# EAGLE board Proiect v37 (EAGLE 9.7.0)
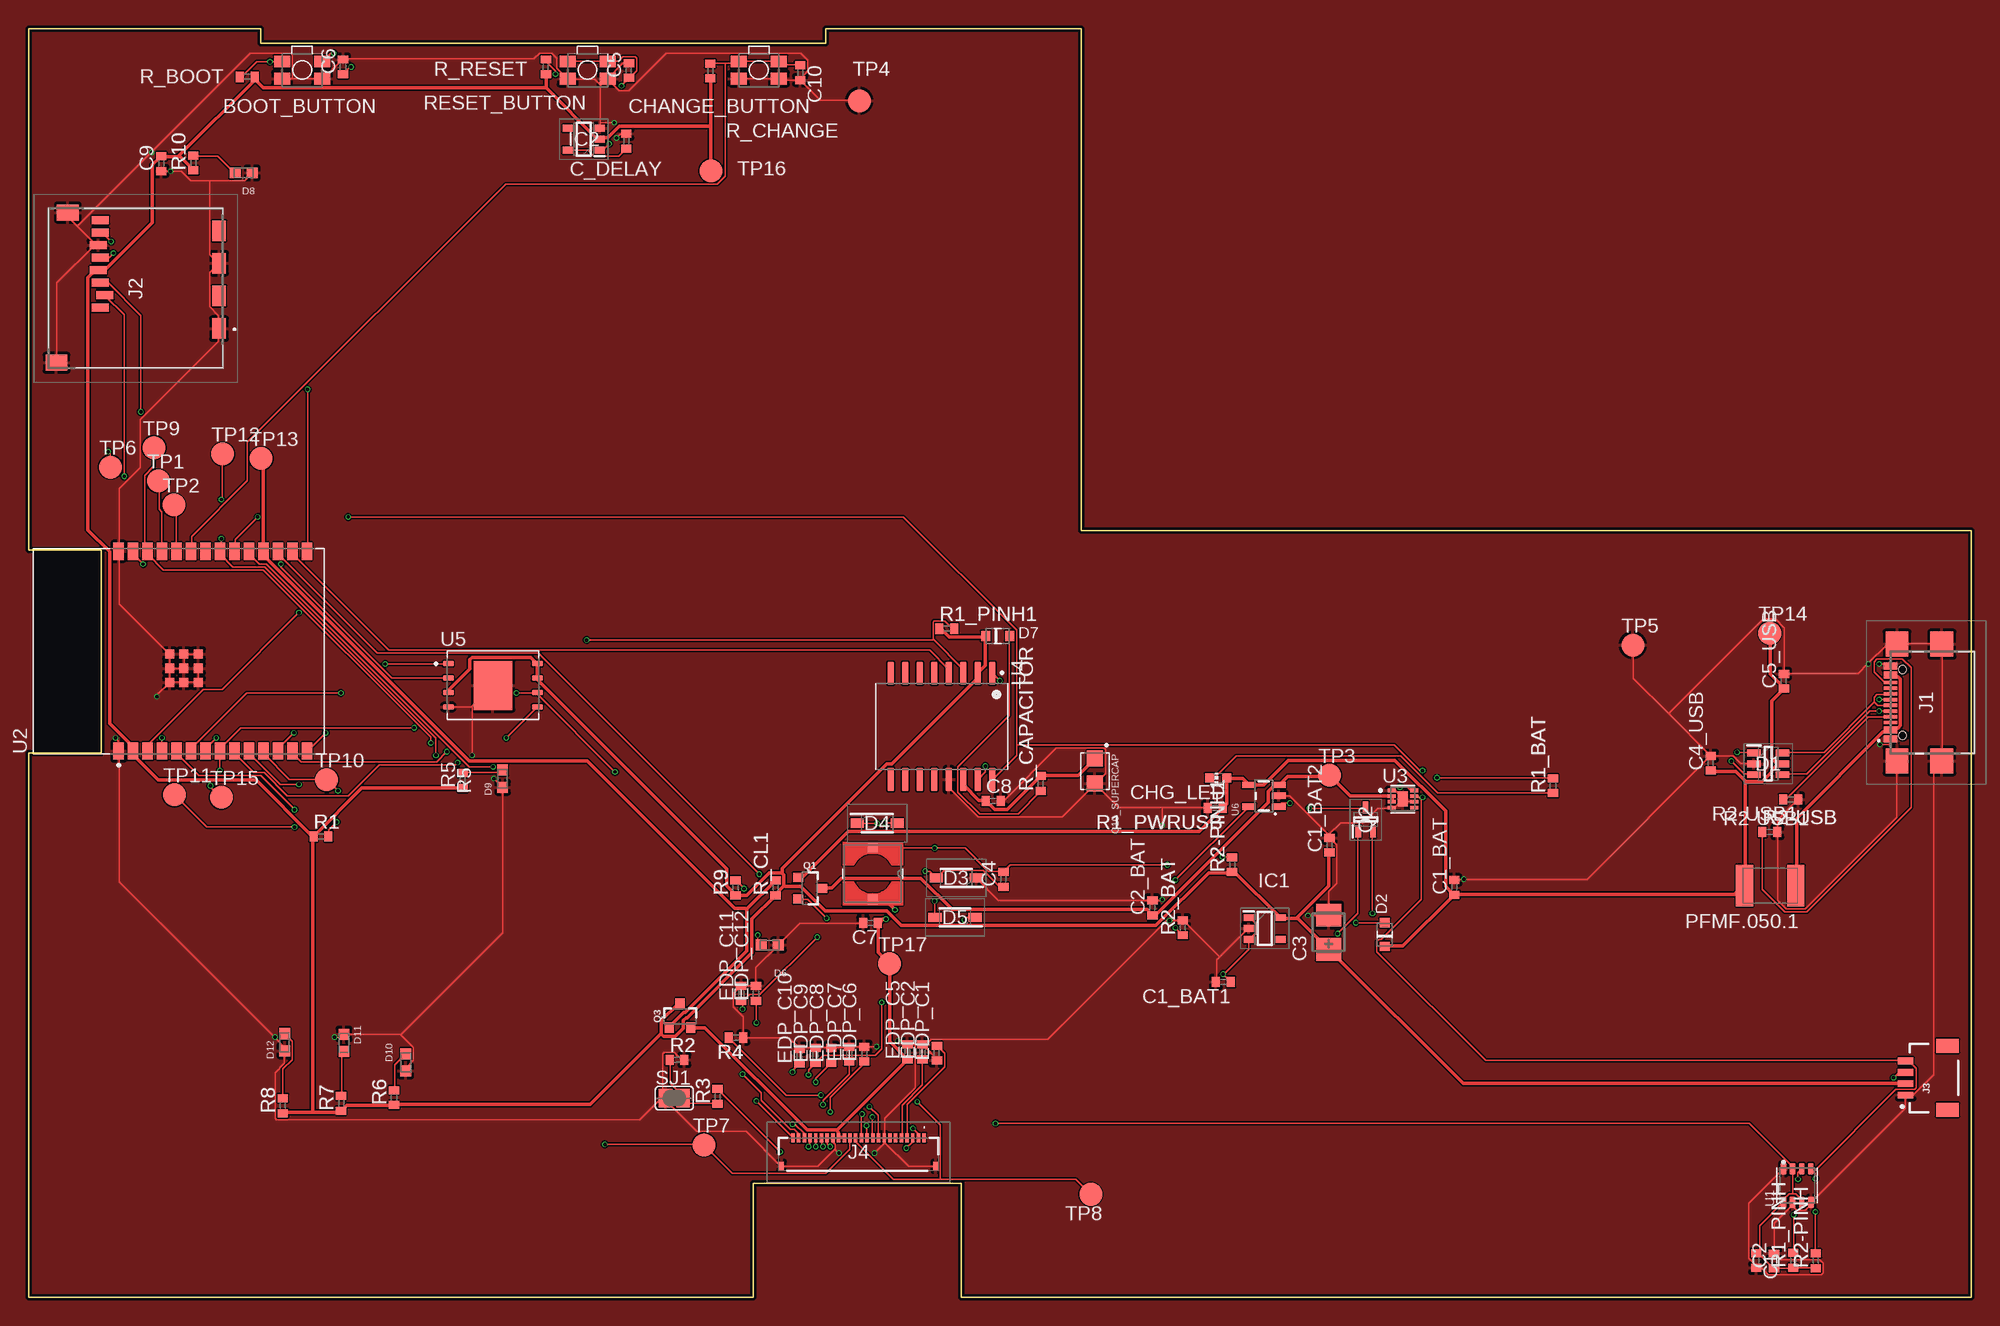
[diagram p0: board, top side]
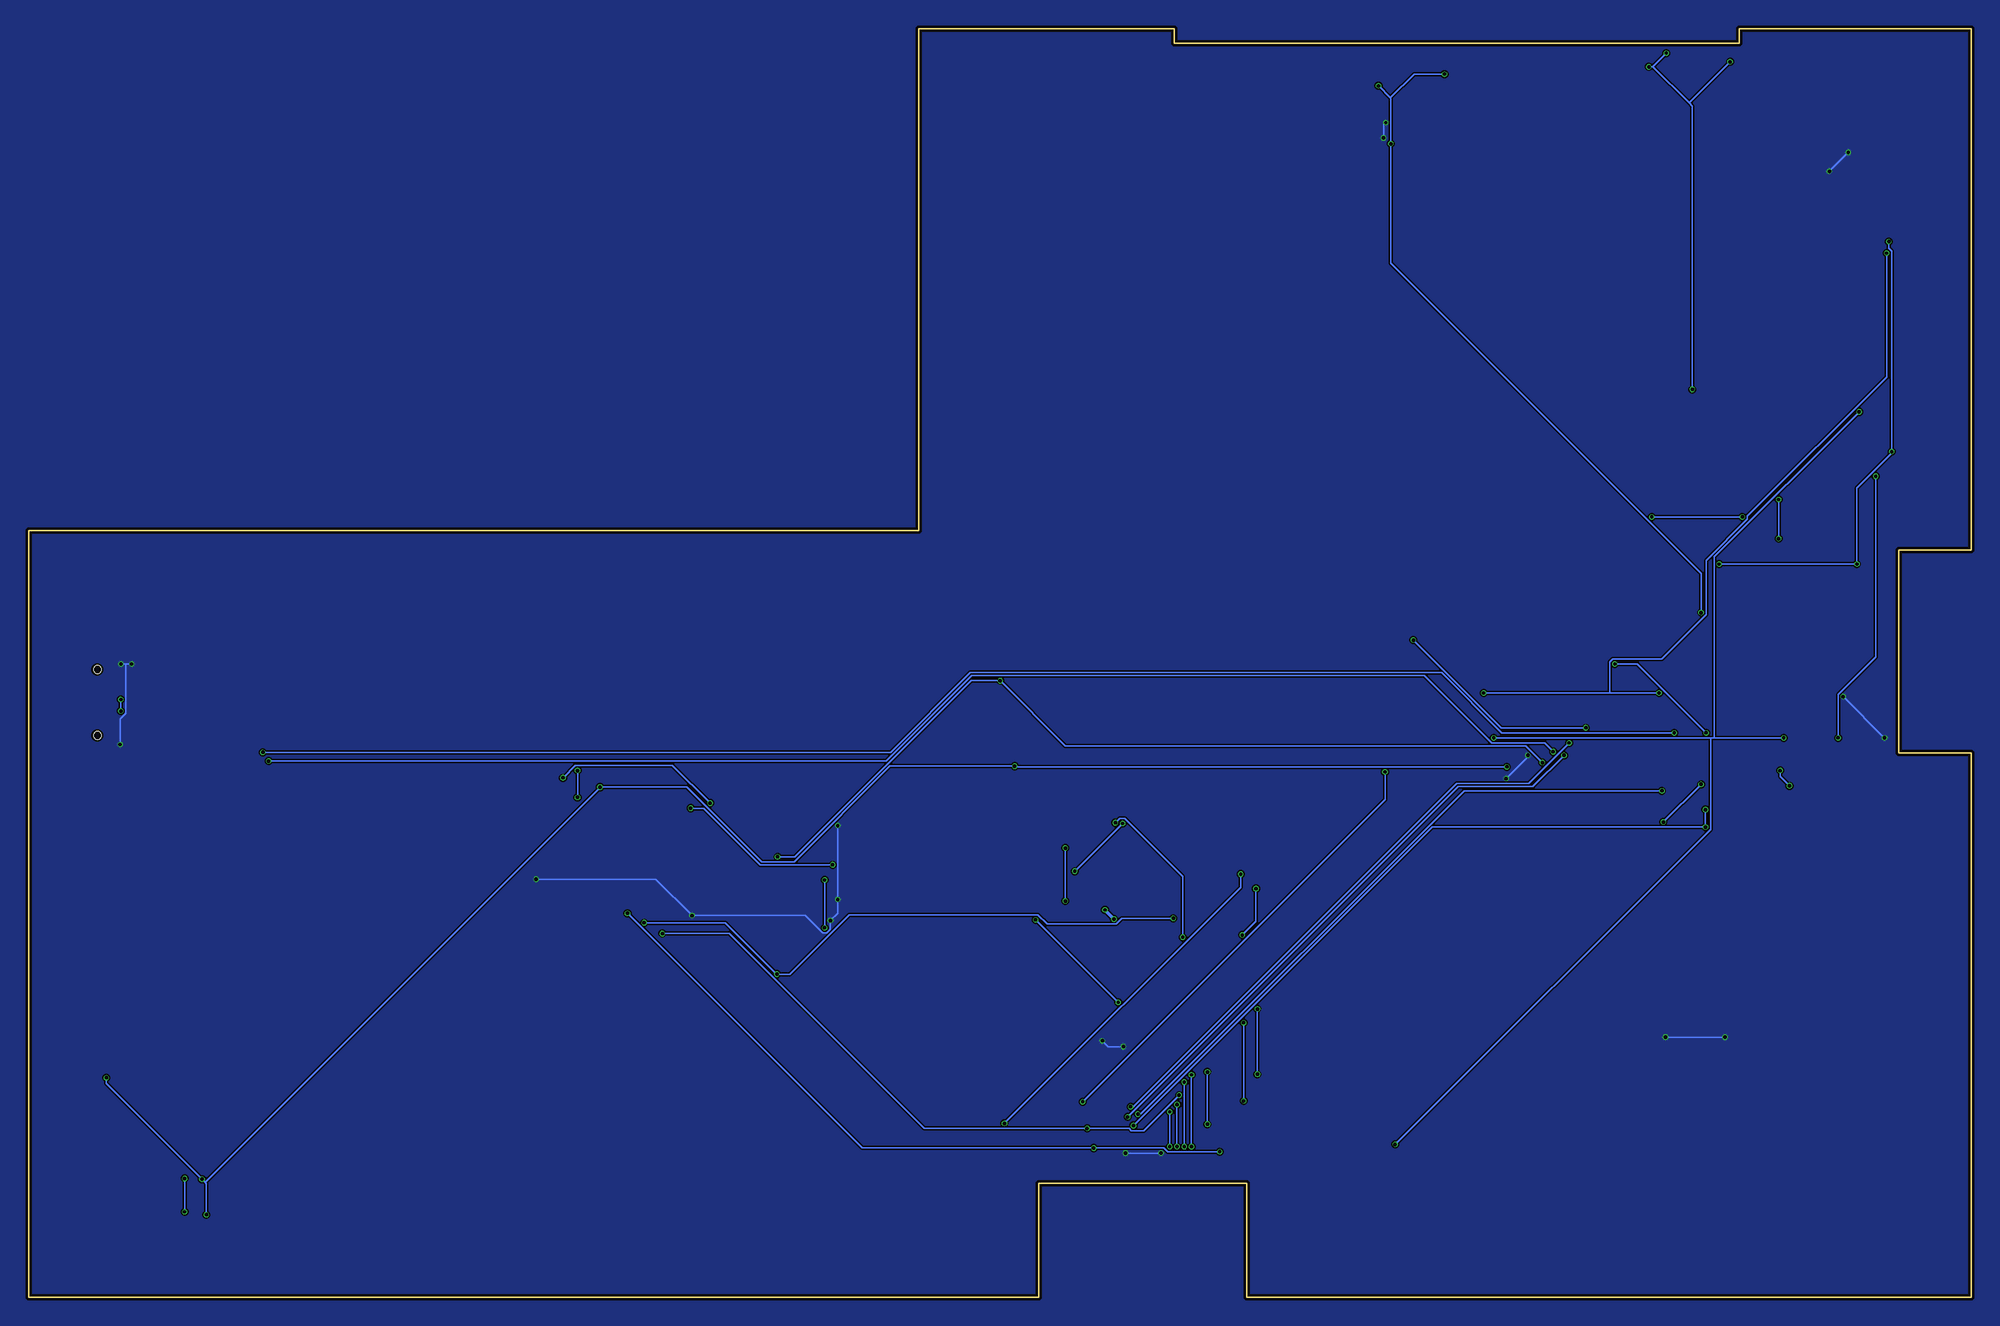
[diagram p1: board, bottom side, seen from below]

Size 170.2 x 111.2 mm. Coordinates in mm from the lower left corner, seen from the top.
Outline: 0,111.2 20.32,111.2 20.32,109.93 69.85,109.93 69.85,111.2 92.2,111.2 92.2,67.2 170.2,67.2 170.2,0 81.7,0 81.7,10 63.5,10 63.5,0 0,0 0,47.7 6.35,47.7 6.35,65.48 0,65.48 0,111.2
Copper layers (1*16): Top 0.035mm / dielectric 1.6mm / Bottom 0.035mm
Design rules "jlcpcb-2layers.dru": minimum track width 5mil, minimum drill 0.3mm, track to track 5mil, track to pad 5mil, pad to pad 5mil, via to via 5mil, smd to smd 5mil, copper to edge 0.2mm, drill to drill 6mil, minimum pad ring 10mil, minimum via ring 3mil, stop-mask expansion 4mil, vias tented up to drill 0mil, thermal gap 10mil
Net classes: 1 net: width 0.3 mm

## Footprints (pad centres in the part's own frame; a part is rotated, then mirrored left to right if it is on the bottom)
MYBUTTON = smd 1.4 x 1.05: 1 1.75,0.75; 2 -1.75,0.75; 3 -1.75,-0.75; 4 1.75,-0.75
ESP32_WROVER_EAGLE-LTSPICE_C0402 = smd 0.7 x 0.9: 1 -0.65,0; 2 0.65,0
RCL_CT3528 = smd 2 x 2.2: + -1.5,0; - 1.5,0
CAPCP3225X100N = smd 1.4 x 1.4: 1 -1.1,0; 2 1.1,0
ADAFRUIT_CHIP-LED0603 = smd 0.8 x 0.8: A 0,-0.75; C 0,0.75
SOT95P280X145-6N = smd 1.2 x 0.6: 1 -1.25,0.95; 2 -1.25,0; 3 -1.25,-0.95; 4 1.25,-0.95; 5 1.25,0; 6 1.25,0.95
ESP32_WROVER_AVX---SD0805S020S1R0_AVX_SD0805S020S1R0_0 = smd 0.8 x 0.9: 1 -1.05,0; 2 1.05,0
SOD3716X135N = smd 1.15 x 0.8: 1 -1.75,0; 2 1.75,0
DIOC1608X36N = smd 0.97 x 0.94: 1 -0.75,0; 2 0.75,0
SOT95P280X120-5N = smd 0.9 x 0.6: 1 -1.4,0.95; 2 -1.4,0; 3 -1.4,-0.95; 4 1.4,-0.95; 5 1.4,0.95
SOT95P280X125-5N = smd 0.9 x 0.6: 1 -1.4,0.95; 2 -1.4,0; 3 -1.4,-0.95; 4 1.4,-0.95; 5 1.4,0.95
SAMACSYS_PARTS_USB4110GFA = smd 0.3 x 1.15: A1 -3.35,3.678; A4 -2.55,3.678; A5 -1.25,3.678; A6 -0.25,3.678; A7 0.25,3.678; A8 1.25,3.678; A9 2.55,3.678; A12 3.35,3.678; B1 3.05,3.678; B4 2.25,3.678; B5 1.75,3.678; B6 0.75,3.678; B7 -0.75,3.678; B8 -1.75,3.678; B9 -2.25,3.678; B12 -3.05,3.678 | smd 2.18 x 2: MP1 -5.11,-0.827; MP2 5.11,-0.827; MP3 -5.11,3.103; MP4 5.11,3.103 | hole 0.65: -2.89,2.603; 2.89,2.603
112ATAARR03ATTEND = smd 1.8 x 1.2: G1 10.6,10.4; G2 4.9,10.4; S1 7.75,10.4; S2 2.05,10.4 | smd 1.4 x 1.9: G3 13.6,-3.85; G4 0.45,-2.85 | smd 0.7 x 1.5: P1 8.8,0; P2 7.7,0.4; P3 6.6,0; P4 5.5,-0.2; P5 4.4,0; P6 3.3,-0.2; P7 2.2,0; P8 1.1,0
JST04_1MM_RA = smd 0.6 x 1.35: 1 -1.5,0; 2 -0.5,0; 3 0.5,0; 4 1.5,0 | smd 1.2 x 2: NC1 2.8,-3.675; NC2 -2.8,-3.675
FH34SRJ24S05SH99 = smd 0.3 x 0.8: 1 5.75,1.45; 2 5.25,1.45; 3 4.75,1.45; 4 4.25,1.45; 5 3.75,1.45; 6 3.25,1.45; 7 2.75,1.45; 8 2.25,1.45; 9 1.75,1.45; 10 1.25,1.45; 11 0.75,1.45; 12 0.25,1.45; 13 -0.25,1.45; 14 -0.75,1.45; 15 -1.25,1.45; 16 -1.75,1.45; 17 -2.25,1.45; 18 -2.75,1.45; 19 -3.25,1.45; 20 -3.75,1.45; 21 -4.25,1.45; 22 -4.75,1.45; 23 -5.25,1.45; 24 -5.75,1.45 | smd 0.4 x 0.8: MP1 6.75,-1.05; MP2 -6.75,-1.05
IND_4828-WE-TPC_WRE = smd 0.889 x 0.889: 1 -2.286,0; 2 2.286,0
ESP32C6_VARISTOR_CT/CN1812 = smd 1.5 x 3.6: 1 -2.25,0; 2 2.25,0
ESP32_WROVER_SPARKFUN-DISCRETESEMI_SOT23-3 = smd 0.8 x 0.9: 1 -0.95,-1; 2 0.95,-1; 3 0,1.1
SOT65P210X110-3N = smd 1.05 x 0.5: 1 -1.05,0.65; 2 -1.05,-0.65; 3 1.05,0
ESP32_WROVER_EAGLE-LTSPICE_R0402 = smd 0.7 x 0.9: 1 -0.65,0; 2 0.65,0
SJ = smd 1.168 x 1.6: 1 -0.762,0; 2 0.762,0
TP20R = smd 2 x 2: TP 0,0
ESP32_WROVER_BME680_PSON80P300X300X100-8N = smd 1.016 x 0.5: 1 1.458,1.2; 2 1.458,0.4; 3 1.458,-0.4; 4 1.458,-1.2; 5 -1.458,-1.22; 6 -1.458,-0.4; 7 -1.458,0.4; 8 -1.458,1.2
XCVR_ESP32-C6-WROOM-1-N8 = smd 1.5 x 0.9: 1 -8.75,5.26; 2 -8.75,3.99; 3 -8.75,2.72; 4 -8.75,1.45; 5 -8.75,0.18; 6 -8.75,-1.09; 7 -8.75,-2.36; 8 -8.75,-3.63; 9 -8.75,-4.9; 10 -8.75,-6.17; 11 -8.75,-7.44; 12 -8.75,-8.71; 13 -8.75,-9.98; 14 -8.75,-11.25; 15 8.75,-11.25; 16 8.75,-9.98; 17 8.75,-8.71; 18 8.75,-7.44; 19 8.75,-6.17; 20 8.75,-4.9; 21 8.75,-3.63; 22 8.75,-2.36; 23 8.75,-1.09; 24 8.75,0.18; 25 8.75,1.45; 26 8.75,2.72; 27 8.75,3.99; 28 8.75,5.26 | smd 0.8 x 0.8: 29_1 -2.755,0.79; 29_2 -1.505,0.79; 29_3 -0.255,0.79; 29_4 -2.755,-0.46; 29_5 -1.505,-0.46; 29_6 -0.255,-0.46; 29_7 -2.755,-1.71; 29_8 -1.505,-1.71; 29_9 -0.255,-1.71
SON50P200X200X80-9N = smd 0.76 x 0.3: 1 -0.985,0.75; 2 -0.985,0.25; 3 -0.985,-0.25; 4 -0.985,-0.75; 5 0.985,-0.75; 6 0.985,-0.25; 7 0.985,0.25; 8 0.985,0.75 | smd 0.9 x 1.3: 9 0,0
SOIC127P1032X265-16N = smd 2.05 x 0.59: 1 -4.655,4.445; 2 -4.655,3.175; 3 -4.655,1.905; 4 -4.655,0.635; 5 -4.655,-0.635; 6 -4.655,-1.905; 7 -4.655,-3.175; 8 -4.655,-4.445; 9 4.655,-4.445; 10 4.655,-3.175; 11 4.655,-1.905; 12 4.655,-0.635; 13 4.655,0.635; 14 4.655,1.905; 15 4.655,3.175; 16 4.655,4.445
SON127P600X800X80-9N = smd 0.94 x 0.44: 1 -3.895,1.905; 2 -3.895,0.635; 3 -3.895,-0.635; 4 -3.895,-1.905; 5 3.895,-1.905; 6 3.895,-0.635; 7 3.895,0.635; 8 3.895,1.905 | smd 3.4 x 4.3: 9 0,0
ESP32_WROVER_SPARKFUN-IC-POWER_SOT23-5 = smd 0.55 x 1.2: 1 -0.95,-1.3; 2 0,-1.3; 3 0.95,-1.3; 4 0.95,1.3; 5 -0.95,1.3

## Placement (x,y rotation side)
BOOT_BUTTON  BUTTON_CUSYOMV11  [MYBUTTON]  23.97,107.56 180 top
C1  4.7uF  [ESP32_WROVER_EAGLE-LTSPICE_C0402]  151.34,3.23 270 top
C1_BAT  4.7uF  [ESP32_WROVER_EAGLE-LTSPICE_C0402]  124.9,35.94 90 top
C1_BAT1  4.7uF  [ESP32_WROVER_EAGLE-LTSPICE_C0402]  104.67,27.65 180 top
C1_BAT2  4.7uF  [ESP32_WROVER_EAGLE-LTSPICE_C0402]  113.97,39.64 90 top
C2  100nF  [ESP32_WROVER_EAGLE-LTSPICE_C0402]  152.9,3.2 90 top
C2_BAT  4.7uF  [ESP32_WROVER_EAGLE-LTSPICE_C0402]  98.45,34.15 90 top
C3  100uF TANT  [RCL_CT3528]  113.89,32 90 top
C4  4.7uF/25V  [ESP32_WROVER_EAGLE-LTSPICE_C0402]  85.4,36.64 90 top
C4_USB  100nF  [ESP32_WROVER_EAGLE-LTSPICE_C0402]  147.36,46.82 90 top
C5  1uF  [ESP32_WROVER_EAGLE-LTSPICE_C0402]  52.59,107.52 90 top
C5_USB  4.7uF  [ESP32_WROVER_EAGLE-LTSPICE_C0402]  153.77,54 90 top
C6  100nF  [ESP32_WROVER_EAGLE-LTSPICE_C0402]  27.55,107.84 90 top
C7  10uF  [ESP32_WROVER_EAGLE-LTSPICE_C0402]  73.76,32.83 180 top
C8  100nF  [ESP32_WROVER_EAGLE-LTSPICE_C0402]  84.5,43.52 0 top
C9  100nF  [ESP32_WROVER_EAGLE-LTSPICE_C0402]  11.62,99.36 90 top
C10  100nF  [ESP32_WROVER_EAGLE-LTSPICE_C0402]  67.61,107.33 270 top
C10_SUPERCAP  CPH3225A  [CAPCP3225X100N]  93.42,46.13 270 top
C_DELAY  100nF  [ESP32_WROVER_EAGLE-LTSPICE_C0402]  52.36,101.33 90 top
CHANGE_BUTTON  BUTTON_CUSYOMV11  [MYBUTTON]  63.97,107.56 180 top
CHG_LED  [ADAFRUIT_CHIP-LED0603]  104.22,45.53 90 top
D1  USBLC6-2SC6Y  [SOT95P280X145-6N]  152.4,46.76 0 top
D2  ESP32_WROVER_AVX---SD0805S020S1R0_AVX_SD0805S020S1R0_0_0  [ESP32_WROVER_AVX---SD0805S020S1R0_AVX_SD0805S020S1R0_0]  118.8,31.8 90 top
D3  MBR0530  [SOD3716X135N]  81.26,36.76 180 top
D4  MBR0530  [SOD3716X135N]  74.34,41.56 0 top
D5  MBR0530  [SOD3716X135N]  81.16,33.3 180 top
D6  PGB1010603MR1  [DIOC1608X36N]  64.94,30.89 180 top
D7  ESP32_WROVER_AVX---SD0805S020S1R0_AVX_SD0805S020S1R0_0_0  [ESP32_WROVER_AVX---SD0805S020S1R0_AVX_SD0805S020S1R0_0]  84.9,57.96 0 top
D8  PGB1010603MR1  [DIOC1608X36N]  18.84,98.55 180 top
D9  PGB1010603MR1  [DIOC1608X36N]  41.53,45.46 90 top
D10  PGB1010603MR1  [DIOC1608X36N]  33.04,20.61 90 top
D11  PGB1010603MR1  [DIOC1608X36N]  27.63,22.32 270 top
D12  PGB1010603MR1  [DIOC1608X36N]  22.44,22.37 90 top
EDP_C1  1uF/50V  [ESP32_WROVER_EAGLE-LTSPICE_C0402]  79.57,21.41 90 top
EDP_C2  1uF/50V  [ESP32_WROVER_EAGLE-LTSPICE_C0402]  78.31,21.51 90 top
EDP_C5  0.1uF/50V  [ESP32_WROVER_EAGLE-LTSPICE_C0402]  76.99,21.52 90 top
EDP_C6  0.1uF/50V  [ESP32_WROVER_EAGLE-LTSPICE_C0402]  73.2,21.32 90 top
EDP_C7  0.1uF/50V  [ESP32_WROVER_EAGLE-LTSPICE_C0402]  71.89,21.33 90 top
EDP_C8  0.1uF/50V  [ESP32_WROVER_EAGLE-LTSPICE_C0402]  70.32,21.23 90 top
EDP_C9  0.1uF/50V  [ESP32_WROVER_EAGLE-LTSPICE_C0402]  68.93,21.23 90 top
EDP_C10  0.1uF/50V  [ESP32_WROVER_EAGLE-LTSPICE_C0402]  67.53,21.15 90 top
EDP_C11  0.1uF/50V  [ESP32_WROVER_EAGLE-LTSPICE_C0402]  62.42,26.64 90 top
EDP_C12  0.1uF/50V  [ESP32_WROVER_EAGLE-LTSPICE_C0402]  63.73,26.64 90 top
IC1  XC6220A331MR-G  [SOT95P280X120-5N]  108.29,32.33 0 top
IC2  BD5229G-TR  [SOT95P280X125-5N]  48.64,101.5 180 top
J1  SAMACSYS_PARTS_USB4110-GF-A  [SAMACSYS_PARTS_USB4110GFA]  166.78,52.14 90 top
J2  112A-TAAR-R03_ATTEND  [112ATAARR03ATTEND]  6.29,95.52 270 top
J3  QWIIC_RIGHT_ANGLE  [JST04_1MM_RA]  164.43,19.24 90 top
J4  FH34SRJ-24S-0.5SH_99_  [FH34SRJ24S05SH99]  72.71,12.54 0 top
L1  744043680IND_4828-WE-TPC_WRE  [IND_4828-WE-TPC_WRE]  73.96,37.14 270 top
PFMF.050.1  ESP32C6_VARISTORCN1812  [ESP32C6_VARISTOR_CT/CN1812]  152.57,36.09 180 top
Q1  20V/4.2A/52mΩ/1.4W  [ESP32_WROVER_SPARKFUN-DISCRETESEMI_SOT23-3]  68.43,35.86 270 top
Q2  SI1308EDL-T1-GE3  [SOT65P210X110-3N]  117.13,41.88 90 top
Q3  20V/4.2A/52mΩ/1.4W  [ESP32_WROVER_SPARKFUN-DISCRETESEMI_SOT23-3]  57.07,24.65 0 top
R1  10K  [ESP32_WROVER_EAGLE-LTSPICE_R0402]  25.62,40.4 0 top
R1_BAT  200  [ESP32_WROVER_EAGLE-LTSPICE_R0402]  133.54,44.84 90 top
R1_PINH  10K  [ESP32_WROVER_EAGLE-LTSPICE_R0402]  154.59,3.25 90 top
R1_PINH1  10K  [ESP32_WROVER_EAGLE-LTSPICE_R0402]  80.44,58.61 0 top
R1_PWRUSB  100K  [ESP32_WROVER_EAGLE-LTSPICE_R0402]  103.97,42.9 180 top
R2  2.2  [ESP32_WROVER_EAGLE-LTSPICE_R0402]  56.81,20.82 0 top
R2-PINH  10K  [ESP32_WROVER_EAGLE-LTSPICE_R0402]  156.55,3.22 90 top
R2-PINH1  10K  [ESP32_WROVER_EAGLE-LTSPICE_R0402]  105.43,37.92 90 top
R2-USB  5k1  [ESP32_WROVER_EAGLE-LTSPICE_R0402]  152.54,40.8 0 top
R2-USB1  5k1  [ESP32_WROVER_EAGLE-LTSPICE_R0402]  154.36,43.65 180 top
R2_BAT  2K  [ESP32_WROVER_EAGLE-LTSPICE_R0402]  101.11,32.4 90 top
R3  0.47  [ESP32_WROVER_EAGLE-LTSPICE_R0402]  60.36,17.62 90 top
R4  10K  [ESP32_WROVER_EAGLE-LTSPICE_R0402]  61.98,22.77 180 top
R5  10K  [ESP32_WROVER_EAGLE-LTSPICE_R0402]  38.04,45.32 90 top
R6  10K  [ESP32_WROVER_EAGLE-LTSPICE_R0402]  32.01,17.52 90 top
R7  10K  [ESP32_WROVER_EAGLE-LTSPICE_R0402]  27.38,17.02 90 top
R8  10K  [ESP32_WROVER_EAGLE-LTSPICE_R0402]  22.26,16.8 90 top
R9  10K  [ESP32_WROVER_EAGLE-LTSPICE_R0402]  61.93,35.9 90 top
R10  10K  [ESP32_WROVER_EAGLE-LTSPICE_R0402]  14.43,99.42 90 top
R_BOOT  10K  [ESP32_WROVER_EAGLE-LTSPICE_R0402]  19.16,106.96 180 top
R_CAPACITOR  15K  [ESP32_WROVER_EAGLE-LTSPICE_R0402]  88.67,45.03 90 top
R_CHANGE  10K  [ESP32_WROVER_EAGLE-LTSPICE_R0402]  59.71,107.48 90 top
R_CL1  10K  [ESP32_WROVER_EAGLE-LTSPICE_R0402]  65.44,35.9 90 top
R_RESET  10K  [ESP32_WROVER_EAGLE-LTSPICE_R0402]  45.32,107.84 90 top
RESET_BUTTON  BUTTON_CUSYOMV11  [MYBUTTON]  48.97,107.56 180 top
SJ1  [SJ]  56.57,17.47 0 top
TP1  TP  [TP20R]  11.38,71.55 0 top
TP2  TP  [TP20R]  12.73,69.45 0 top
TP3  TP  [TP20R]  113.98,45.75 0 top
TP4  TP  [TP20R]  72.78,104.86 0 top
TP5  TP  [TP20R]  140.53,57.16 0 top
TP6  TP  [TP20R]  7.18,72.76 0 top
TP7  TP  [TP20R]  59.17,13.36 0 top
TP8  TP  [TP20R]  93.07,9.04 180 top
TP9  TP  [TP20R]  10.99,74.46 0 top
TP10  TP  [TP20R]  26.11,45.36 0 top
TP11  TP  [TP20R]  12.78,44.04 0 top
TP12  TP  [TP20R]  17.01,73.92 0 top
TP13  TP  [TP20R]  20.37,73.52 0 top
TP14  TP  [TP20R]  152.53,58.22 0 top
TP15  TP  [TP20R]  16.89,43.82 0 top
TP16  TP  [TP20R]  59.78,98.74 0 top
TP17  TP  [TP20R]  75.43,29.24 0 top
U1  ESP32_WROVER_BME680_BME680  [ESP32_WROVER_BME680_PSON80P300X300X100-8N]  154.93,9.81 90 top
U2  ESP32-C6-WROOM-1-N8  [XCVR_ESP32-C6-WROOM-1-N8]  13.15,56.64 90 top
U3  MAX17048G+T10  [SON50P200X200X80-9N]  120.39,43.68 0 top
U4  DS3231SN#  [SOIC127P1032X265-16N]  79.99,50.04 270 top
U5  W25Q512JVEIQ  [SON127P600X800X80-9N]  40.68,53.64 0 top
U6  ESP32_WROVER_SPARKFUN-IC-POWER_MCP73831  [ESP32_WROVER_SPARKFUN-IC-POWER_SOT23-5]  108.21,43.96 90 top

## Library data of the parts
BOOT_BUTTON C1 C1_BAT1 C1_BAT2 C2 C4_USB C5 C5_USB C6 C8-C10 C_DELAY CHANGE_BUTTON CHG_LED D2 D6-D12 EDP_C1 EDP_C2 EDP_C5-EDP_C12 PFMF.050.1 R1 R1_BAT R1_PINH R1_PINH1 R1_PWRUSB R2 R2-PINH R2-PINH1 R2-USB R2-USB1 R2_BAT R3-R10 R_BOOT R_CAPACITOR R_CHANGE R_CL1 R_RESET RESET_BUTTON SJ1 TP1-TP17 = DeskAssistant v19 v1
C1_BAT C2_BAT C4 C7 = DeskAssistant v19 v1; SPICEMODEL: NONE; SPICEPREFIX: C
C3 = DeskAssistant v19 v1; SPICEPREFIX: C
C10_SUPERCAP = DeskAssistant v19 v1; AVAILABILITY: Not in stock; CHECK_PRICES: https://www.snapeda.com/parts/CPH3225A/Seiko+Instruments/view-part/?ref=eda; DESCRIPTION: 11 mF (EDLC) Supercapacitor 3.3 V 1210 (3225 Metric) - -; MF: Seiko Instruments; MP: CPH3225A; PACKAGE: 1210 Seiko; PRICE: None; PURCHASE-URL: https://www.snapeda.com/api/url_track_click_mouser/?unipart_id=562593&manufacturer=Seiko Instruments&part_name=CPH3225A&search_term=None; SNAPEDA_LINK: https://www.snapeda.com/parts/CPH3225A/Seiko+Instruments/view-part/?ref=snap
D1 = DeskAssistant v19 v1; AVAILABILITY: In Stock; CHECK_PRICES: https://www.snapeda.com/parts/USBLC6-2SC6Y/STMicroelectronics/view-part/?ref=eda; DESCRIPTION: 17V Clamp 5A (8/20µs) Ipp Tvs Diode Surface Mount SOT-23-6; MF: STMicroelectronics; MP: USBLC6-2SC6Y; PACKAGE: SOT-23-6 STMicroelectronics; PRICE: None; SNAPEDA_LINK: https://www.snapeda.com/parts/USBLC6-2SC6Y/STMicroelectronics/view-part/?ref=snap
D3-D5 = DeskAssistant v19 v1; AVAILABILITY: In Stock; CHECK_PRICES: https://www.snapeda.com/parts/MBR0530/Onsemi/view-part/?ref=eda; DESCRIPTION: Diode Schottky 30 V 500mA Surface Mount SOD-123; MF: ON Semiconductor; MP: MBR0530; PACKAGE: SOD-123-2 ON Semiconductor; PRICE: None; PURCHASE-URL: https://www.snapeda.com/api/url_track_click_mouser/?unipart_id=179458&manufacturer=ON Semiconductor&part_name=MBR0530&search_term=None; SNAPEDA_LINK: https://www.snapeda.com/parts/MBR0530/Onsemi/view-part/?ref=snap
IC1 = DeskAssistant v19 v1; DESCRIPTION: LDO Voltage Regulators; HEIGHT: 1.2mm; MANUFACTURER_NAME: Torex; MANUFACTURER_PART_NUMBER: XC6220A331MR-G; MOUSER_PART_NUMBER: 865-XC6220A331MR-G; MOUSER_PRICE-STOCK: https://www.mouser.co.uk/ProductDetail/Torex-Semiconductor/XC6220A331MR-G?qs=AsjdqWjXhJ8ZSWznL1J0gg%3D%3D
IC2 = DeskAssistant v19 v1; DESCRIPTION: Voltage Detector with Adjustable Delay Time: CMOS processes are utilized to develop high precision, low current consumption CMOS reset ICs that allow arbitrary setting of the delay time. The extensive lineup includes both Nch Open Drain and CMOS output types in a wide range of detection voltages (from 2.3V to 6.0V, in 0.1V steps), enabling selection of the ideal solution based on customer requirements. In addition, the entire series is of course both lead-free and RoHS-compliant.; HEIGHT: 1.25mm; MANUFACTURER_NAME: ROHM Semiconductor; MANUFACTURER_PART_NUMBER: BD5229G-TR; MOUSER_PART_NUMBER: 755-BD5229G-TR; MOUSER_PRICE-STOCK: https://www.mouser.co.uk/ProductDetail/ROHM-Semiconductor/BD5229G-TR?qs=4kLU8WoGk0vvnhrrYwdszw%3D%3D
J1 = DeskAssistant v19 v1; DESCRIPTION: CONN USB 2.0 TYPE-C R/A SMT; HEIGHT: 3.26mm; MANUFACTURER_NAME: GCT (GLOBAL CONNECTOR TECHNOLOGY); MANUFACTURER_PART_NUMBER: USB4110-GF-A; MOUSER_PART_NUMBER: 640-USB4110-GF-A; MOUSER_PRICE-STOCK: https://www.mouser.co.uk/ProductDetail/GCT/USB4110-GF-A?qs=KUoIvG%2F9IlYiZvIXQjyJeA%3D%3D
J2 = DeskAssistant v19 v1; DESCRIPTION: Micro SD Card Socket, Push-Push Type, Top Mount, SMT, H=1.83mm, 10u; HEIGHT: 1.9mm; MANUFACTURER_NAME: ATTEND; MANUFACTURER_PART_NUMBER: 112A-TAAR-R03 ATTEND
J3 = DeskAssistant v19 v1; PROD_ID: CONN-13694
J4 = DeskAssistant v19 v1; DESCRIPTION: 24 Position FFC, FPC Connector Contacts, Top and Bottom 0.020" (0.50mm) Surface Mount, Right Angle; HEIGHT: 1.1mm; MANUFACTURER_NAME: Hirose; MANUFACTURER_PART_NUMBER: FH34SRJ-24S-0.5SH(99); MOUSER_PART_NUMBER: 798-FH34SRJ24S05SH99; MOUSER_PRICE-STOCK: https://www.mouser.co.uk/ProductDetail/Hirose-Connector/FH34SRJ-24S-0.5SH99?qs=vcbW%252B4%252BSTIpKBl5ap9J8Fw%3D%3D
L1 = DeskAssistant v19 v1; COPYRIGHT: Copyright (C) 2024 Ultra Librarian. All rights reserved.; MANUFACTURER_PART_NUMBER: 744043680; MFR_NAME: Wurth Electronics
Q1 Q3 = DeskAssistant v19 v1; PROD_ID: TRAN-14388
Q2 = DeskAssistant v19 v1; AVAILABILITY: In Stock; CHECK_PRICES: https://www.snapeda.com/parts/SI1308EDL-T1-GE3/Vishay+Siliconix/view-part/?ref=eda; DESCRIPTION: Si1308EDL-T1-GE3 N-channel MOSFET Transistor, 1.5 A, 30 V, 3-Pin SC-70 | Siliconix / Vishay SI1308EDL-T1-GE3; MF: Vishay Siliconix; MP: SI1308EDL-T1-GE3; PACKAGE: SOT-323 Vishay Semiconductor; PRICE: None; PURCHASE-URL: https://www.snapeda.com/api/url_track_click_mouser/?unipart_id=274603&manufacturer=Vishay Siliconix&part_name=SI1308EDL-T1-GE3&search_term=None; SNAPEDA_LINK: https://www.snapeda.com/parts/SI1308EDL-T1-GE3/Vishay+Siliconix/view-part/?ref=snap
U1 = DeskAssistant v19 v1; AVAILABILITY: Unavailable; DESCRIPTION: Integrated Environmental Unit; MF: Bosch Sensortec; MP: BME680; PACKAGE: LGA-8 Bosch Tools; PRICE: None
U2 = DeskAssistant v19 v1; AVAILABILITY: In Stock; CHECK_PRICES: https://www.snapeda.com/parts/ESP32-C6-WROOM-1-N8/Espressif+Systems/view-part/?ref=eda; DESCRIPTION: Multiprotocol Modules ESP32-C6 module, Wi-Fi 6 in 2.4 GHz band, Bluetooth 5, Zigbee 3.0 and Thread. ESP34-WROOM Compatible - ENGINEERING SAMPLE; MF: Espressif Systems; MP: ESP32-C6-WROOM-1-N8; PACKAGE: None; PRICE: None; SNAPEDA_LINK: https://www.snapeda.com/parts/ESP32-C6-WROOM-1-N8/Espressif+Systems/view-part/?ref=snap
U3 = DeskAssistant v19 v1; AVAILABILITY: In Stock; CHECK_PRICES: https://www.snapeda.com/parts/MAX17048G+T10/Analog+Devices/view-part/?ref=eda; DESCRIPTION: 3µA 1-Cell/2-Cell Fuel Gauge with ModelGauge; MF: Analog Devices; MP: MAX17048G+T10; PACKAGE: TDFN-8 Maxim; PRICE: None; PURCHASE-URL: https://www.snapeda.com/api/url_track_click_mouser/?unipart_id=329239&manufacturer=Analog Devices&part_name=MAX17048G+T10&search_term=None; SNAPEDA_LINK: https://www.snapeda.com/parts/MAX17048G+T10/Analog+Devices/view-part/?ref=snap
U4 = DeskAssistant v19 v1; AVAILABILITY: In Stock; CHECK_PRICES: https://www.snapeda.com/parts/DS3231SN%23/Analog+Devices/view-part/?ref=eda; DESCRIPTION: Extremely Accurate I²C-Integrated RTC/TCXO/Crystal; MF: Analog Devices; MP: DS3231SN#; PACKAGE: SOIC-16 Maxim; PRICE: None; PURCHASE-URL: https://www.snapeda.com/api/url_track_click_mouser/?unipart_id=99048&manufacturer=Analog Devices&part_name=DS3231SN#&search_term=None; SNAPEDA_LINK: https://www.snapeda.com/parts/DS3231SN%23/Analog+Devices/view-part/?ref=snap
U5 = DeskAssistant v19 v1; AVAILABILITY: In Stock; CHECK_PRICES: https://www.snapeda.com/parts/W25Q512JVEIQ/Winbond+Electronics/view-part/?ref=eda; DESCRIPTION: FLASH - NOR Memory IC 512Mb (64M x 8) SPI - Quad I/O 133 MHz 8-WSON (8x6); MF: Winbond Electronics; MP: W25Q512JVEIQ; PACKAGE: Package; PRICE: None; SNAPEDA_LINK: https://www.snapeda.com/parts/W25Q512JVEIQ/Winbond+Electronics/view-part/?ref=snap
U6 = DeskAssistant v19 v1; PROD_ID: IC-09995

## Nets
3V3 [net]: C1_BAT2.1 C3.+ C9.2 D7.1 IC1.5 IC2.2 J2.P4 J3.2 Q3.3 R1.1 R1_PINH1.1 R2-PINH1.1 R5.1 R6.1 R7.1 R8.1 R9.1 R10.1 R_BOOT.1 R_CHANGE.1 R_CL1.1 R_RESET.1 TP16.TP U2.2 U4.2 U5.3 U5.7 U5.8
32KHZ: R2-PINH1.2 U2.9 U4.1
DN: D1.4 J1.A7 J1.B7
DP: D1.6 J1.A6 J1.B6
EPD_3V3 [net]: C7.1 EDP_C5.1 J4.15 J4.16 L1.2 Q3.2 TP17.TP
EPD_3V3_C [net]: Q3.1 R_CL1.2 TP13.TP U2.18
EPD_BUSY: J4.9 TP9.TP U2.26
EPD_CS: J4.12 TP10.TP U2.11
EPD_DC: J4.11 TP11.TP U2.5
EPD_RST: J4.10 TP12.TP U2.21
FLASH_CS: U2.12 U5.1
GDR: J4.2 Q2.1 R4.2
GND: BOOT_BUTTON.1 BOOT_BUTTON.2 C1.2 C1_BAT1.2 C1_BAT2.2 C1_BAT.2 C2.2 C2_BAT.2 C3.- C4_USB.2 C5.2 C5_USB.2 C6.2 C7.2 C8.2 C9.1 C10.2 C10_SUPERCAP.2 C_DELAY.2 CHANGE_BUTTON.1 CHANGE_BUTTON.2 D1.2 D3.1 D6.1 D8.1 D9.1 D10.1 D11.1 D12.1 EDP_C1.1 EDP_C2.2 EDP_C5.2 EDP_C6.2 EDP_C7.2 EDP_C8.2 EDP_C9.2 EDP_C10.2 EDP_C11.2 EDP_C12.2 IC1.2 IC2.3 J1.A1 J1.A12 J1.B1 J1.B12 J1.MP1 J1.MP2 J1.MP3 J1.MP4 J2.G1 J2.G2 J2.G3 J2.G4 J2.P6 J3.1 J4.8 J4.17 J4.MP1 J4.MP2 R1_PWRUSB.2 R2-USB1.1 R2-USB.2 R2.2 R2_BAT.2 R4.1 RESET_BUTTON.1 RESET_BUTTON.2 SJ1.1 TP4.TP TP5.TP U1.1 U1.5 U1.7 U2.1 U2.28 U2.29_1 U2.29_2 U2.29_3 U2.29_4 U2.29_5 U2.29_6 U2.29_7 U2.29_8 U2.29_9 U3.1 U3.4 U3.6 U3.9 U4.13 U5.4 U5.9 U6.2
GPI08: R1.2 U2.10
I2C_PW: C1.1 C2.1 R1_PINH.1 R2-PINH.1 U1.2 U1.6 U1.8 U2.17
INT_RTC: R1_PINH1.2 TP15.TP U2.8 U4.3
IO/BOOT: BOOT_BUTTON.3 BOOT_BUTTON.4 C6.1 R_BOOT.2 U2.15
IO/CHANGE: C10.1 CHANGE_BUTTON.3 CHANGE_BUTTON.4 R_CHANGE.2 U2.23
MISO: J2.P7 TP6.TP U2.27 U5.2
MOSI: J2.P3 J4.14 TP7.TP U2.7 U5.5
N$1: EDP_C6.1 J4.18
N$2: C1_BAT1.1 D2.2 IC1.1 IC1.3 Q1.2
N$3: J1.A5 R2-USB1.2
N$4: EDP_C7.1 J4.19
N$5: EDP_C1.2 J4.4
N$6: EDP_C2.1 J4.5
N$7: EDP_C8.1 J4.20
N$8: C_DELAY.1 IC2.5
N$9: EDP_C12.1 J4.24
N$10: D7.2 R_CAPACITOR.1
N$11: J1.B5 R2-USB.1
N$12: EDP_C10.1 J4.22
N$13: D12.2 R8.2
N$14: D11.2 R7.2
N$15: D10.2 R6.2
N$16: D9.2 R5.2
N$17: D6.2 R9.2
N$18: D8.2 R10.2
N$19: R1_BAT.2 U6.1
N$20: CHG_LED.C R1_BAT.1
N$21: R2_BAT.1 U6.5
N$23: C4.1 D3.2 D4.1
PREVGH: D5.1 EDP_C9.1 J4.21
PREVGL: D4.2 EDP_C11.1 J4.23
RESE: J4.3 Q2.2 R3.2
RESE': R2.1 R3.1 SJ1.2
RESET: C5.1 IC2.1 R_RESET.2 RESET_BUTTON.3 RESET_BUTTON.4 U2.3
RTC_RST: U2.16 U4.4
RX: TP2.TP U2.24
SCK: J2.P5 J4.13 TP8.TP U2.6 U5.6
SCL: J3.4 R2-PINH.2 U1.4 U2.20 U3.7 U4.16
SDA: J3.3 R1_PINH.2 U1.3 U2.19 U3.8 U4.15
SRC: C4.2 D5.2 L1.1 Q2.3
SS_SD: J2.P2 U2.4
TX: TP1.TP U2.25
USB_D+: D1.1 U2.14
USB_D-: D1.3 U2.13
VBAT [net]: C2_BAT.1 Q1.3 TP3.TP U3.2 U3.3 U6.3
VBUS [net]: C1_BAT.1 C4_USB.1 C5_USB.1 CHG_LED.A D1.5 D2.1 PFMF.050.1.2 Q1.1 R1_PWRUSB.1 TP14.TP U6.4
VRTC [net]: C8.1 C10_SUPERCAP.1 R_CAPACITOR.2 U4.14
VUSB [net]: J1.A4 J1.A9 J1.B4 J1.B9 PFMF.050.1.1

## Tracks (layer width: path | path; a pad name or v marks a point on that pad's centre or on a via)
3V3
  Top 0.3: 111.19,33.22 109.73,33.22 IC1.5 109.6,33.35 105.73,37.22 105.47,37.22 R2-PINH1.1 105.28,37.22 103.38,37.22 98.74,32.59 76.45,32.59 75.18,33.86 69.79,33.86 67.63,36.02 66.29,36.02 66.17,36.08 | 111.19,33.22 113.86,30.56 C3.+ 113.98,30.43 125.67,18.74 164.4,18.74 J3.2 | C1_BAT2.1 113.92,38.94 113.92,36.08 111.19,33.35 111.19,33.22 | 45.34,105.99 49.78,101.55 50.04,101.55 IC2.2 50.16,101.61 50.74,101.61 51.75,102.63 59.75,102.63 | 45.34,105.99 45.34,107.14 R_RESET.1 | 59.75,102.63 59.75,98.75 TP16.TP | 59.75,102.63 59.75,106.82 R_CHANGE.1 | 13.21,99.96 13.27,99.96 14.41,98.82 R10.1 | 13.21,99.96 11.62,99.96 C9.2 11.49,99.9 10.86,99.26 10.86,94.18 6.73,90.06 6.1,90.06 J2.P4 5.97,89.99 5.84,89.99 5.21,89.36 5.21,67.26 7.11,65.35 7.11,50.3 9.14,48.27 9.14,48.02 U2.2 9.21,47.83 9.21,47.51 11.37,45.35 19.94,45.35 24.83,40.46 R1.1 | 13.21,99.96 13.21,100.09 19.81,106.69 19.81,106.95 R_BOOT.1 19.94,106.63 20.57,105.99 45.34,105.99 | 24.89,16.2 27.24,16.2 27.37,16.33 R7.1 27.5,16.46 27.88,16.84 32,16.84 R6.1 32.13,16.9 49.21,16.9 55.31,23 55.44,23.06 | 24.89,16.2 22.29,16.2 R8.1 | R1.1 25.02,40.46 29.21,44.65 38.04,44.65 R5.1 | 24.89,16.2 24.89,40.27 R1.1 | U5.3 36.83,53.03 36.83,53.23 38.67,55.07 38.67,55.89 38.86,56.08 44.01,56.08 44.51,55.57 U5.8 44.58,55.45 44.58,54.3 U5.7 44.64,54.18 44.64,54.05 61.15,37.54 61.15,36.08 61.85,35.38 R9.1 61.98,35.25 62.93,35.25 64.9,37.22 65.98,37.22 | R1_PINH1.1 79.82,58.56 79.95,58.56 80.64,57.86 83.69,57.86 D7.1 83.82,57.92 83.82,55.38 83.19,54.75 U4.2 83.12,54.56 83.12,54.24 75.63,46.75 75.18,46.75 66.04,37.6 66.04,37.35 65.98,37.22
  Top 0.3: 55.44,23.06 55.44,24.27 56.9,25.73 57.02,25.73 Q3.3 | 55.44,23.06 55.63,22.87 56.64,22.87 57.34,23.57 57.34,24.27 57.59,24.52 57.72,24.52 63.37,30.17 63.37,33.16 65.41,35.19 R_CL1.1 65.47,35.38 66.17,36.08 | 65.98,37.22 66.17,37.03 66.17,36.08
32KHZ  (via drill 0.3)
  Top 0.127: v104.58,38.62 105.41,38.62 R2-PINH1.2 | v85.09,54.05 84.45,54.69 U4.1 | v37.59,46.87 37.4,46.68 30.73,46.68 28,43.95 22.67,43.95 20.64,45.98 19.75,45.98 18.1,47.64 18.1,47.83 U2.9
  Bottom 0.127: v104.58,38.62 103.06,38.62 87.63,54.05 v85.09,54.05 79.38,48.34 39.05,48.34 v37.59,46.87
DN  (via drill 0.3)
  Top 0.127: J1.B7 163.07,51.38 v162.12,51.38 161.29,51.38 155.77,45.86 153.67,45.86 D1.4 | v162.12,52.4 163.07,52.4 J1.A7
  Bottom 0.127: v162.12,51.38 v162.12,52.4
DP
  Top 0.127: 161.7,52.18 161.67,52.21 161.67,52.59 161.93,52.84 163.07,52.84 J1.B6 | 161.7,52.18 161.99,51.89 163.07,51.89 J1.A6 | 161.7,52.18 157.29,47.76 153.67,47.76 D1.6
EPD_3V3  (via drill 0.3)
  Top 0.3: v75.9,33.97 75.06,34.81 73.98,34.81 L1.2 | v75.12,33.16 74.87,33.16 74.55,32.84 C7.1 74.42,32.78 74.42,30.24 75.37,29.28 TP17.TP 75.44,29.09 75.44,22.43 76.9,20.97 EDP_C5.1 76.96,20.84 70.87,14.74 70.74,14.68 | J4.15 71.44,14.05 70.99,14.05 J4.16 70.93,14.17 70.93,14.49 70.74,14.68 | 70.74,14.68 68.2,14.68 59.24,23.63 58.04,23.63 Q3.2
  Bottom 0.3: v75.9,33.97 75.9,33.94 v75.12,33.16
EPD_3V3_C
  Top 0.3: TP13.TP 20.38,73.48 20.57,73.29 20.57,65.42 U2.18 20.7,65.29 20.7,64.91 38.61,47 48.96,47 61.85,34.11 62.8,34.11 62.93,34.05 | 62.93,34.05 62.93,30.37 57.53,24.97 57.4,24.97 56.13,23.7 Q3.1 | 62.93,34.05 65.41,36.52 R_CL1.2
EPD_BUSY  (via drill 0.3)
  Top 0.127: v73.66,16.71 74.42,15.95 74.42,14.05 J4.9 | v35.24,48.59 35.24,49.1 20.57,63.77 11.81,63.77 10.48,65.1 10.48,65.35 U2.26 10.41,65.42 10.16,65.67 10.16,72.02 10.99,72.85 10.99,74.43 TP9.TP
  Bottom 0.127: v73.66,16.71 73.41,16.71 45.09,45.03 38.8,45.03 v35.24,48.59
EPD_CS  (via drill 0.3)
  Top 0.127: v73.03,16.08 72.96,16.01 72.96,14.05 J4.12 | v27.11,44.4 26.16,45.35 TP10.TP 26.1,45.41 22.86,45.41 20.64,47.64 20.64,47.83 U2.11
  Bottom 0.127: v73.03,16.08 72.77,16.08 44.45,44.4 v27.11,44.4
EPD_DC  (via drill 0.3)
  Top 0.127: v73.41,15.06 73.41,14.05 J4.11 | v23.3,41.22 15.62,41.22 12.83,44.02 TP11.TP | v23.3,42.75 20.32,45.73 14.92,45.73 13.02,47.64 13.02,47.83 U2.5
  Bottom 0.127: v73.41,15.06 47.24,41.22 v23.3,41.22 v23.3,42.75
EPD_RST  (via drill 0.3)
  Top 0.127: v73.91,15.82 73.91,14.05 J4.10 | v35.69,47.51 35.69,49.03 20.7,64.02 17.91,64.02 16.83,65.1 16.83,65.35 U2.21 16.89,65.35 v16.89,66.5 | v16.89,69.93 16.95,69.99 16.95,73.86 TP12.TP
  Bottom 0.127: v73.91,15.82 44.96,44.78 38.42,44.78 v35.69,47.51 | v16.89,66.5 v16.89,69.93
FLASH_CS  (via drill 0.3)
  Top 0.127: v31.24,55.51 36.77,55.51 U5.1 | v23.24,49.48 21.91,48.14 21.91,47.89 U2.12
  Bottom 0.127: v31.24,55.51 29.27,55.51 v23.24,49.48
GDR  (via drill 0.3)
  Top 0.127: v77.47,14.81 77.92,14.36 77.92,14.05 J4.2 | v69.41,17.73 66.36,17.73 61.34,22.74 R4.2 | v114.68,31.89 116.46,33.67 116.46,40.78 Q2.1
  Bottom 0.127: v69.41,17.73 72.52,14.62 73.6,14.62 73.79,14.81 v77.47,14.81 91.76,14.81 108.84,31.89 v114.68,31.89
GND  (via drill 0.3)
  Top 0.127: 21.56,22.78 7.94,36.4 7.94,47.83 U2.1 7.87,47.95 7.87,48.78 v7.62,49.03 | 21.56,22.78 22.42,21.92 22.42,21.67 D12.1 22.42,21.6 22.42,20.52 21.59,19.7 21.59,15.7 21.72,15.57 53.53,15.57 55.56,17.6 SJ1.1 | 38.83,51.8 40.64,53.61 U5.9 | 38.83,51.8 38.8,51.76 36.83,51.76 U5.4 | 32.61,23.03 32.58,23.06 27.69,23.06 D11.1 27.37,22.81 v26.8,22.81 | 32.61,23.03 33.72,21.92 33.72,20.78 33.08,20.14 33.08,19.89 D10.1 | 32.61,23.03 41.53,31.95 41.53,44.65 D9.1 v40.77,45.48 | v38.86,47.51 38.86,51.76 38.83,51.8 | v21.59,22.81 21.56,22.78 | U2.29_1 12.38,53.92 12.38,55.13 U2.29_2 | U2.29_2 12.38,55.19 12.38,56.34 U2.29_3 12.32,56.4 7.94,60.78 7.94,65.35 U2.28 7.94,65.42 7.94,70.88 9.78,72.72 9.78,76.91 16.64,83.77 16.64,84.91 J2.G1 16.64,84.97 16.64,86.05 15.88,86.82 15.88,89.8 16.64,90.56 J2.G2 16.64,90.63 15.88,91.39 15.88,97.87 | U2.29_1 12.45,53.92 13.59,53.92 U2.29_4 13.65,53.92 14.86,53.92 U2.29_7 14.86,53.99 U2.29_8 | U2.29_2 12.45,55.13 13.59,55.13 U2.29_5 13.65,55.19 13.65,56.34 U2.29_6 13.72,56.34 14.86,56.34 U2.29_9 | 15.88,97.87 18.92,97.87 19.56,98.5 D8.1 | 15.88,97.87 14.22,97.87 13.4,98.69 v12.45,98.69 11.62,98.69 C9.1 | 4.29,93.9 3.49,94.69 3.49,95.01 J2.G4 | 4.29,93.9 5.91,92.28 6.03,92.28 J2.P6 5.84,92.28 2.48,88.91 2.48,81.93 J2.G3 | C10.2 67.56,106.69 65.79,106.69 65.72,106.75 CHANGE_BUTTON.2 65.66,106.82 CHANGE_BUTTON.1 | TP4.TP 72.77,104.91 69.34,104.91 67.63,106.63 C10.2 | 23.11,106.82 BOOT_BUTTON.2 25.78,106.75 27.5,108.47 C6.2 27.56,108.53 44.26,108.53 44.77,109.04 45.85,109.04 46.29,108.6 46.29,107.71 47.18,106.82 RESET_BUTTON.1 47.24,106.75 49.59,106.75 50.13,106.22
  Top 0.127: 23.11,106.82 BOOT_BUTTON.1 | 50.1,102.95 50.1,106.18 50.13,106.22 | 50.1,102.95 50.1,102.5 IC2.3 | 50.13,106.22 50.67,106.75 RESET_BUTTON.2 | v51.5,101.61 51.82,101.93 52.32,101.93 C_DELAY.2 | 50.1,102.95 v51.31,102.95 | C5.2 52.58,108.15 52.07,108.15 50.74,106.82 RESET_BUTTON.2 | C10.2 67.56,106.75 68.26,107.45 68.26,108.41 67.63,109.04 55.88,109.04 52.58,105.74 51.75,105.74 50.74,106.75 RESET_BUTTON.2 | 10.76,100.37 19.43,109.04 22.99,109.04 23.11,108.91 23.11,106.82 | 10.76,100.37 4.29,93.9 | v10.79,100.34 10.76,100.37 | v11.24,52.65 11.24,52.78 12.32,53.86 U2.29_1 | C1_BAT.2 124.9,36.65 v125.73,36.65 136.53,36.65 147.32,47.45 C4_USB.2 | D1.2 151.13,46.81 149.99,46.81 149.35,47.45 147.38,47.45 C4_USB.2 | 143.67,51.16 147.32,47.51 C4_USB.2 | 143.67,51.16 140.59,54.24 140.59,57.1 TP5.TP | U1.1 153.67,11.25 150.69,8.27 150.69,3.44 151.32,2.81 151.32,2.62 C1.2 151.38,2.55 151.83,2.55 152.4,1.98 157.04,1.98 157.23,2.17 157.23,3 156.91,3.31 153.54,3.31 152.97,3.89 C2.2 152.91,3.89 152.91,6.49 154.5,8.08 154.5,8.33 U1.7 154.5,8.01 154.88,7.63 155.64,7.63 156.15,8.14 156.15,8.33 U1.5 156.21,8.39 164.4,16.59 164.4,17.73 J3.1 164.47,17.79 165.16,17.79 166.88,19.51 166.88,46.3 167.58,47 J1.MP1 167.64,47.06 167.64,57.23 J1.MP2 167.58,57.29 163.7,57.29 J1.MP4 163.64,57.23 162.81,57.23 161.13,55.54 | R2-USB1.1 155,43.64 153.23,41.86 153.23,40.84 R2-USB.2 153.23,40.78 153.23,34.81 153.99,34.05 155.64,34.05 163.64,42.05 163.64,47 J1.MP3 163.64,47.06 163.13,47.57 163.13,48.46 | J1.B12 163.13,49.03 163.13,48.84 J1.A1 163.13,48.78 163.13,48.46 | J1.B1 163.13,55.19 163.13,55.45 J1.A12 163.07,55.51 v162.12,55.51
  Top 0.127: 161.13,55.54 160.27,54.69 153.8,54.69 C5_USB.2 153.8,54.75 153.8,58.69 153.03,59.45 151.96,59.45 143.67,51.16 | v161.16,55.51 161.13,55.54 | v162.18,48.46 163.13,48.46 | 99.31,42.94 95.5,42.94 93.47,44.97 C10_SUPERCAP.2 | 99.31,42.94 103.31,42.94 R1_PWRUSB.2 | C8.2 85.15,43.57 85.47,43.57 90.04,48.14 94.23,48.14 94.36,48.02 94.36,45.92 93.47,45.03 C10_SUPERCAP.2 | U4.13 80.64,45.35 80.64,44.65 83.19,42.11 90.55,42.11 93.41,44.97 C10_SUPERCAP.2 | R2.2 57.4,20.84 57.21,20.84 56.58,21.48 55.69,21.48 55.56,21.35 55.56,17.67 55.75,17.47 SJ1.1 | 70.64,13 70.67,13.03 70.67,13.41 70.48,13.6 70.48,13.98 J4.17 | 70.64,13 69.15,11.51 65.98,11.51 J4.MP2 65.91,11.51 62.87,14.55 58.55,14.55 55.82,17.28 55.82,17.41 SJ1.1 | U3.9 120.4,43.64 119.7,42.94 119.44,42.94 U3.4 119.38,42.87 118.17,42.87 116.9,41.6 114.94,41.6 113.92,40.59 C1_BAT2.2 | U3.6 121.35,43.45 120.65,43.45 120.46,43.64 U3.9 | U3.1 119.44,44.4 119.76,44.4 120.46,43.7 U3.9 | C1_BAT2.2 113.92,40.33 113.92,40.53 110.49,43.95 109.54,43.95 U6.2 | C1_BAT2.2 113.98,40.27 114.62,39.64 114.62,36.27 113.92,35.57 113.92,33.54 C3.- 113.86,33.48 v112.08,33.48 | C7.2 73.09,32.78 67.56,32.78 65.72,30.94 D6.1 65.66,30.87 63.69,28.9 63.69,27.38 EDP_C12.2 63.69,27.32 62.42,27.32 EDP_C11.2 62.36,27.25 61.72,26.62 61.72,25.48 62.61,24.59 62.61,22.81 R4.1 62.67,22.74 66.61,22.74 67.5,21.86 EDP_C10.2 67.56,21.86 68.9,21.86 EDP_C9.2 68.96,21.92 70.29,21.92 EDP_C8.2 70.36,21.92 71.88,21.92 EDP_C7.2 71.94,21.98 73.15,21.98 EDP_C6.2 73.22,21.98 v74.3,21.98 | D3.1 83.06,36.71 84.96,34.81 98.42,34.81 C2_BAT.2 98.49,34.81 99.25,34.81 v99.31,34.87
  Top 0.127: 104.33,29.86 106.74,32.27 106.87,32.27 IC1.2 | 104.33,29.86 104.08,29.6 104.08,27.7 C1_BAT1.2 | 104.33,29.86 101.16,33.03 R2_BAT.2 101.09,33.03 v99.95,33.03 99.69,33.03 89.28,22.62 79.06,22.62 78.49,22.05 EDP_C2.2 | 77.66,22.17 77.03,22.17 EDP_C5.2 76.96,22.17 76.64,22.49 v76.14,22.49 | 77.66,22.17 78.3,22.17 EDP_C2.2 | EDP_C1.1 79.57,20.78 79.57,20.9 78.36,22.11 EDP_C2.2 | 75.03,13.57 74.99,13.6 74.99,13.98 J4.8 74.99,14.05 74.99,15.7 77.66,18.36 77.66,22.17 | 75.03,13.57 77.09,11.51 79.44,11.51 J4.MP1 | v70.99,12.65 70.64,13 | 75.03,13.57 v74.11,12.65 | v99.31,41.35 99.31,42.94
  Bottom 0.127: v38.86,47.51 38.86,47.38 v40.77,45.48 | v26.8,22.81 v21.59,22.81 | v51.5,101.61 51.5,102.75 v51.31,102.95 | v10.79,100.34 v12.45,98.69 | v11.24,52.65 v7.62,49.03 | v161.16,55.51 161.67,55.51 | 161.67,55.51 v162.12,55.51 | v162.18,48.46 162.18,50.68 161.67,51.19 161.67,55.51 | v74.3,21.98 75.63,21.98 v76.14,22.49 | v74.11,12.65 v70.99,12.65 | v99.31,41.35 v99.31,34.87 99.31,33.67 v99.95,33.03 99.95,32.27 100.27,31.95 100.65,31.95 102.17,33.48 v112.08,33.48 115.25,36.65 v125.73,36.65
  pour Top: -36.82,-15.62 222.02,-15.62 222.02,152.32 -36.82,152.32
  pour Bottom: -42.42,-20.92 235.22,-20.92 235.22,160.22 -42.42,160.22
GPI08  (via drill 0.3)
  Top 0.127: v26.99,41.67 26.29,40.97 26.29,40.46 R1.2 | v23.69,44.97 22.04,44.97 19.37,47.64 19.37,47.83 U2.10
  Bottom 0.127: v23.69,44.97 v26.99,41.67
I2C_PW  (via drill 0.3)
  Top 0.127: R2-PINH.1 156.53,2.62 154.62,2.62 R1_PINH.1 154.56,2.55 C2.1 152.84,2.55 151.57,3.82 151.38,3.82 C1.1 151.64,3.82 151.64,6.3 153.67,8.33 U1.8 153.73,8.39 153.73,8.58 154.24,9.09 154.56,9.09 | 154.56,9.09 154.81,9.09 155.32,8.58 155.32,8.39 U1.6 | 154.56,9.09 154.56,11.25 U1.2 154.5,11.31 154.5,11.51 150.75,15.25 v84.71,15.25 | v64.01,37.09 44.64,56.46 30.54,56.46 21.91,65.1 21.91,65.35 U2.17
  Bottom 0.127: v64.01,37.09 64.01,35.95 v84.71,15.25
INT_RTC  (via drill 0.3)
  Top 0.127: v16.76,46.18 16.76,47.83 U2.8 16.83,47.89 16.83,48.14 18.61,49.92 v33.78,49.92 | v15.94,44.84 15.94,44.72 16.83,43.83 TP15.TP | 79.28,57.64 81.85,55.07 81.85,54.75 U4.3 | 79.28,57.64 79.25,57.67 79.25,59.19 79.31,59.26 80.26,59.26 80.9,58.62 81.09,58.62 R1_PINH1.2 | v48.9,57.61 79.25,57.61 79.28,57.64
  Bottom 0.127: v16.76,46.18 16.76,45.67 v15.94,44.84 | v33.78,49.92 41.21,49.92 v48.9,57.61
IO/BOOT  (via drill 0.3)
  Top 0.127: R_BOOT.2 18.54,107.01 18.73,107.01 20,108.28 v21.14,108.28 22.16,108.28 BOOT_BUTTON.4 | v28.26,107.84 28.19,107.84 C6.1 | v26.73,109.04 26.48,109.04 25.78,108.34 BOOT_BUTTON.3 | v24.45,79.58 24.45,65.42 U2.15
  Bottom 0.127: v28.26,107.84 27.94,107.84 27.91,107.87 | v26.73,109.04 27.91,107.87 | v24.45,79.58 24.45,104.41 24.73,104.69 | 27.91,107.87 24.73,104.69 | 24.73,104.69 v21.14,108.28
IO/CHANGE
  Top 0.127: C10.1 67.56,108.03 65.98,108.03 65.72,108.28 CHANGE_BUTTON.3 65.66,108.34 62.23,108.34 CHANGE_BUTTON.4 62.17,108.28 62.04,108.15 61.02,108.15 | 61.02,108.15 59.75,108.15 R_CHANGE.2 | 61.02,108.15 61.02,98.25 60.33,97.55 41.78,97.55 19.18,74.94 19.18,71.58 14.29,66.69 14.29,65.42 U2.23
MISO  (via drill 0.3)
  Top 0.127: v22.1,64.27 22.1,64.02 31.81,54.3 36.77,54.3 U5.2 | v10.03,64.27 9.21,65.1 9.21,65.35 U2.27 | v7.24,92.53 6.48,93.29 6.35,93.29 J2.P7 | v6.99,74.12 7.18,73.93 7.18,72.78 TP6.TP
  Bottom 0.127: v22.1,64.27 v10.03,64.27 10.03,70.94 6.99,73.99 v6.99,74.12 6.99,91.71 7.24,91.96 v7.24,92.53
MOSI  (via drill 0.3)
  Top 0.127: J4.14 71.94,13.98 71.94,12.97 69.85,10.87 61.66,10.87 59.18,13.35 TP7.TP 59.12,13.41 v50.48,13.41 | v41.85,49.03 44.51,51.7 U5.5 | v16.45,49.03 15.56,48.14 15.56,47.89 U2.7 | v9.84,77.61 9.84,86.05 6.99,88.91 6.35,88.91 J2.P3
  Bottom 0.127: v16.45,49.03 22.54,49.03 | 22.54,49.03 22.86,49.03 | 22.86,49.03 v41.85,49.03 | v9.84,77.61 22.54,64.91 22.54,49.03 | v50.48,13.41 22.86,41.03 22.86,49.03
N$1  (via drill 0.3)
  Top 0.127: v70.23,13.22 69.98,13.47 69.98,13.98 J4.18 | v70.23,16.27 70.23,17.54 73.15,20.46 73.15,20.65 EDP_C6.1
  Bottom 0.127: v70.23,16.27 v70.23,13.22
N$2  (via drill 0.3)
  Top 0.127: IC1.1 106.93,33.22 107.06,33.22 107.57,32.71 107.57,31.95 107.44,31.83 107.38,31.83 106.93,31.38 IC1.3 106.87,31.32 106.87,30.49 104.71,28.33 v104.65,28.33 105.28,27.7 C1_BAT1.1 | v69.91,33.22 68.26,34.87 67.44,34.87 Q1.2 | v116.27,32.84 118.75,32.84 D2.2
  Bottom 0.127: v69.91,33.22 74.42,33.22 74.93,32.71 80.96,32.71 81.79,33.54 98.3,33.54 103.5,28.33 v104.65,28.33 109.16,32.84 v116.27,32.84
N$3
  Top 0.127: R2-USB1.2 153.73,43.7 153.99,43.7 161.16,50.88 163.07,50.88 J1.A5
N$4  (via drill 0.3)
  Top 0.127: v69.6,13.22 69.47,13.35 J4.19 | v69.6,16.9 69.6,17.28 71.88,19.57 71.88,20.65 EDP_C7.1
  Bottom 0.127: v69.6,16.9 v69.6,13.22
N$5
  Top 0.127: J4.4 76.96,14.05 76.96,16.9 80.26,20.2 80.26,21.41 79.63,22.05 EDP_C1.2
N$6
  Top 0.127: J4.5 76.52,14.05 76.52,16.84 78.3,18.62 78.3,20.84 EDP_C2.1
N$7  (via drill 0.3)
  Top 0.127: v68.96,13.22 J4.20 | v68.96,18.87 68.96,19.19 70.29,20.52 EDP_C8.1
  Bottom 0.127: v68.96,18.87 v68.96,13.22
N$8
  Top 0.127: IC2.5 47.24,100.53 49.02,100.53 49.53,100.02 51.69,100.02 52.32,100.66 C_DELAY.1
N$9  (via drill 0.3)
  Top 0.127: v63.75,17.22 66.93,14.05 J4.24 | v63.75,24.08 63.75,25.98 EDP_C12.1
  Bottom 0.127: v63.75,24.08 v63.75,17.22
N$10
  Top 0.127: D7.2 85.92,57.92 85.92,51 81.41,46.49 81.41,44.27 83.31,42.37 86.68,42.37 88.65,44.34 R_CAPACITOR.1
N$11
  Top 0.127: R2-USB.1 151.89,40.78 151.89,35.76 153.86,33.79 155.77,33.79 164.91,42.94 164.91,55.19 164.15,55.96 161.93,55.96 161.67,55.7 161.67,54.81 162.56,53.92 163.07,53.92 J1.B5
N$12  (via drill 0.3)
  Top 0.127: v66.93,15.19 67.12,15.19 67.94,14.36 67.94,14.05 J4.22 | v66.93,19.76 66.93,19.89 67.5,20.46 EDP_C10.1
  Bottom 0.127: v66.93,19.76 v66.93,15.19
N$13
  Top 0.127: R8.2 22.29,17.47 22.29,20.01 23.11,20.84 23.11,22.43 22.48,23.06 D12.2
N$14
  Top 0.127: R7.2 27.43,17.73 27.43,21.35 27.62,21.54 D11.2
N$15
  Top 0.127: R6.2 32.07,18.17 32.07,20.39 33.02,21.35 D10.2
N$16
  Top 0.127: R5.2 38.1,45.98 41.34,45.98 41.53,46.18 D9.2
N$17  (via drill 0.3)
  Top 0.127: v62.67,35.83 61.98,36.52 R9.2 | v63.88,31.76 63.88,31.19 64.14,30.94 D6.2
  Bottom 0.127: v62.67,35.83 62.67,32.97 v63.88,31.76
N$18
  Top 0.127: R10.2 14.48,100.02 16.57,100.02 18.03,98.56 D8.2
N$19  (via drill 0.3)
  Top 0.127: v123.38,45.54 133.48,45.54 R1_BAT.2 | v110.49,43.32 109.79,43.32 109.54,43.06 U6.1
  Bottom 0.127: v123.38,45.54 122.3,46.62 113.79,46.62 v110.49,43.32
N$20
  Top 0.127: CHG_LED.C 103.5,45.54 103.89,45.54 105.79,47.45 120.21,47.45 123.44,44.21 133.48,44.21 R1_BAT.1
N$21  (via drill 0.3)
  Top 0.127: v100.46,32.4 101.09,31.76 R2_BAT.1 | v100.46,36.59 106.87,43 U6.5
  Bottom 0.127: v100.46,36.59 v100.46,32.4
N$23  (via drill 0.3)
  Top 0.127: C4.1 85.34,36.02 85.03,36.02 83.63,37.41 80.2,37.41 79.57,36.78 D3.2 79.5,36.78 78.93,37.35 v78.55,37.35 | v74.36,41.54 72.64,41.54 D4.1
  Bottom 0.127: v78.55,37.35 v74.36,41.54
PREVGH  (via drill 0.3)
  Top 0.127: v68.33,13.22 68.45,13.35 J4.21 | v68.33,19.51 68.33,19.95 68.9,20.52 EDP_C9.1 68.96,20.59 69.6,21.22 74.17,21.22 74.74,21.79 v74.74,25.86 | v81.98,33.09 82.17,33.28 82.87,33.28 D5.1
  Bottom 0.127: v68.33,19.51 v68.33,13.22 | v74.74,25.86 v81.98,33.09
PREVGL  (via drill 0.3)
  Top 0.127: v62.55,19.57 64.2,17.92 64.2,17.28 66.74,14.74 67.06,14.74 67.44,14.36 67.44,14.05 J4.23 | v62.55,25.28 62.55,25.86 EDP_C11.1 62.55,25.92 63.18,26.56 64.07,26.56 v69.09,31.57 | v74.99,41.6 76.07,41.6 D4.2
  Bottom 0.127: v62.55,25.28 v62.55,19.57 | v74.99,41.6 74.61,41.98 74.17,41.98 69.09,36.91 v69.09,31.57
RESE  (via drill 0.3)
  Top 0.127: v76.9,13.09 77.41,13.6 77.41,13.98 J4.3 | v65.85,12.78 60.39,18.24 R3.2 | v117.73,33.67 117.73,40.78 Q2.2
  Bottom 0.127: v65.85,12.78 70.42,12.78 70.74,13.09 v76.9,13.09 97.16,13.09 v117.73,33.67
RESE'
  Top 0.127: R3.1 60.33,17.03 57.72,17.03 57.34,17.41 SJ1.2 57.28,17.47 57.28,17.67 56.2,18.74 56.2,20.78 R2.1
RESET  (via drill 0.3)
  Top 0.127: RESET_BUTTON.4 47.24,108.34 50.67,108.34 RESET_BUTTON.3 50.74,108.34 51.69,108.34 52.07,108.72 53.15,108.72 53.28,108.6 53.28,107.52 52.64,106.88 C5.1 52.58,106.82 v51.94,106.18 | v50.86,101.1 50.35,100.6 50.1,100.6 IC2.1 | v46.16,107.2 46.16,107.45 45.34,108.28 45.34,108.47 R_RESET.2 | v23.69,60.02 16.95,53.29 15.3,53.29 10.48,48.46 10.48,47.89 U2.3
  Bottom 0.127: v51.94,106.18 50.9,105.14 | 50.9,105.14 50.86,105.1 v50.86,101.1 50.86,90.63 23.69,63.45 v23.69,60.02 | v46.16,107.2 48.83,107.2 50.9,105.14
RTC_RST
  Top 0.127: U2.16 23.18,65.35 23.18,65.1 31.56,56.72 78.93,56.72 80.58,55.07 80.58,54.75 U4.4
RX
  Top 0.127: U2.24 12.95,65.42 12.95,69.23 12.76,69.42 TP2.TP
SCK  (via drill 0.3)
  Top 0.127: 79.88,10.36 91.76,10.36 93.03,9.09 TP8.TP | 79.88,10.36 75.75,10.36 72.52,13.6 72.52,13.98 J4.13 | v42.74,52.97 44.51,52.97 U5.6 44.51,52.91 v51.37,46.05 | v27.37,52.97 19.11,52.97 14.29,48.14 14.29,47.89 U2.6 | v7.43,91.52 7.05,91.13 6.35,91.13 J2.P5 | 79.88,10.36 79.88,15.12 v77.85,17.16
  Bottom 0.127: v27.37,52.97 31.69,52.97 | 31.69,52.97 v42.74,52.97 | v7.43,91.52 7.43,80.66 19.62,68.46 19.62,68.21 23.24,64.59 23.24,59.83 27.11,55.96 31.43,55.96 31.69,55.7 31.69,52.97 | v77.85,17.16 51.37,43.64 v51.37,46.05
SCL  (via drill 0.3)
  Top 0.127: v156.53,7.51 156.53,3.89 R2-PINH.2 | v156.53,10.42 156.53,10.87 156.37,11.03 | 156.37,11.03 156.15,11.25 U1.4 | 121.95,43.67 121.98,43.64 121.98,34.87 118.49,31.38 118.3,31.38 118.11,31.19 118.11,30.3 127.64,20.78 164.4,20.78 J3.4 164.47,20.71 164.72,20.71 165.35,20.08 165.35,18.36 165.23,18.24 163.58,18.24 156.37,11.03 | 121.95,43.67 121.73,43.89 121.41,43.89 U3.7 | v20.07,68.4 18.1,66.43 18.1,65.42 U2.20 | v28,68.4 76.64,68.4 86.55,58.5 86.55,48.4 | 86.55,48.4 86.55,47.51 84.45,45.41 U4.16 | v122.11,43.83 121.95,43.67 | v122.11,46.18 121.86,46.18 119.63,48.4 86.55,48.4
  Bottom 0.127: v156.53,10.42 v156.53,7.51 | v28,68.4 v20.07,68.4 | v122.11,46.18 v122.11,43.83
SDA  (via drill 0.3)
  Top 0.127: v154.62,7.25 154.62,3.95 R1_PINH.2 | v155,10.36 155,10.93 155.32,11.25 U1.3 | v163.39,19.25 163.83,19.7 164.4,19.7 J3.3 | v120.14,44.72 120.78,44.72 121.03,44.46 121.35,44.46 U3.8 | v83.82,46.56 83.82,46.05 83.19,45.41 U4.15 | v40.7,46.49 38.61,46.49 20.83,64.27 20.19,64.27 19.37,65.1 19.37,65.35 U2.19
  Bottom 0.127: v154.62,7.25 154.62,9.98 154.72,10.08 | 154.72,10.08 v155,10.36 163.39,18.74 v163.39,19.25 | 120.08,44.72 112.52,44.72 105.98,38.17 103.12,38.17 94.74,46.56 v83.82,46.56 83.76,46.49 v40.7,46.49 | 120.08,44.72 154.72,10.08 | 120.08,44.72 v120.14,44.72
SRC  (via drill 0.3)
  Top 0.127: L1.1 73.98,39.38 v79.38,39.38 82.04,39.38 84.07,37.35 85.34,37.35 C4.2 85.41,37.35 85.98,37.92 v99.76,37.92 | v112.2,42.87 117.09,42.87 Q2.3 | v79.38,34.75 79.38,33.35 D5.2
  Bottom 0.127: v112.2,42.87 111.06,42.87 106.11,37.92 v99.76,37.92 | v79.38,39.38 v79.38,34.75
SS_SD  (via drill 0.3)
  Top 0.127: v8.38,71.96 8.38,86.12 6.73,87.77 J2.P2 | v11.68,49.03 11.68,47.89 U2.4
  Bottom 0.127: v8.38,71.96 8.38,56.15 11.68,52.84 v11.68,49.03
TX
  Top 0.127: U2.25 11.68,65.42 11.68,68.84 11.43,69.1 11.43,71.51 TP1.TP
USB_D+  (via drill 0.3)
  Top 0.127: v149.67,47.76 151.13,47.76 D1.1 | v26.04,49.48 24.45,47.89 U2.14
  Bottom 0.127: v149.67,47.76 94.68,47.76 87.69,54.75 46.42,54.75 41.15,49.48 v26.04,49.48
USB_D-  (via drill 0.3)
  Top 0.127: v149.16,47 150.3,45.86 151.13,45.86 D1.3 | v36.64,47.83 35.75,46.94 23.88,46.94 23.18,47.64 23.18,47.83 U2.13
  Bottom 0.127: v149.16,47 95.06,47 87.57,54.49 47.94,54.49 42.04,48.59 37.4,48.59 v36.64,47.83
VBAT
  Top 0.3: U3.3 119.44,43.45 119.44,43.89 U3.2 119.32,43.95 115.76,43.95 113.98,45.73 TP3.TP 113.86,45.67 110.3,45.67 109.6,44.97 U6.3 109.47,44.91 109.16,44.91 108.58,44.34 108.58,43.38 98.74,33.54 98.49,33.54 C2_BAT.1 98.36,33.6 97.98,33.98 80.9,33.98 78.17,36.71 71.18,36.71 70.36,35.89 69.53,35.89 Q1.3
VBUS
  Top 0.3: Q1.1 67.44,36.84 67.82,36.84 71.82,40.84 102.55,40.84 104.58,42.87 R1_PWRUSB.1 104.71,43 104.97,43.26 104.97,45.35 CHG_LED.A 105.03,45.48 106.36,45.48 106.87,44.97 U6.4 107.06,44.91 108.2,44.91 110.36,47.06 119.7,47.06 124.14,42.62 124.14,36.02 124.78,35.38 C1_BAT.1 | D2.1 118.81,30.81 120.4,30.81 124.84,35.25 C1_BAT.1 | 150.43,45.22 149.54,46.11 147.38,46.11 C4_USB.1 | 150.43,45.22 151.89,45.22 152.72,46.05 152.72,46.18 153.29,46.75 153.61,46.75 D1.5 153.16,46.81 152.72,47.26 152.72,52.27 153.67,53.23 C5_USB.1 153.73,53.35 153.73,53.48 152.59,54.62 152.59,58.18 TP14.TP | 150.43,45.22 150.37,45.1 150.37,36.14 PFMF.050.1.2 150.18,36.08 149.42,35.32 125.03,35.32 C1_BAT.1
VRTC
  Top 0.3: U4.14 81.92,45.35 81.92,44.91 83.25,43.57 83.82,43.57 C8.1 83.95,43.45 84.64,42.75 85.72,42.75 88.58,45.6 R_CAPACITOR.2 88.71,45.73 91.95,45.73 93.41,47.19 C10_SUPERCAP.1
VUSB
  Top 0.3: J1.A9 163.13,54.69 163.13,54.43 J1.B4 163.26,54.37 163.77,54.37 163.96,54.18 163.96,50.11 163.77,49.92 163.26,49.92 J1.B9 163.13,49.86 163.13,49.61 J1.A4 163,49.54 162.43,49.54 154.88,41.98 154.88,36.14 PFMF.050.1.1